# Altium PCB PCB1.PcbDoc
Units mm, origin at the board's own origin, x right, y up, seen from the top; angles counter-clockwise.
Board outline 60.25 x 80.25 mm, 2 copper layers (Top Layer, Bottom Layer); 11 components, 31 nets, 72 pads, 0 vias.
Unrouted connection lines stored in the file: 1.
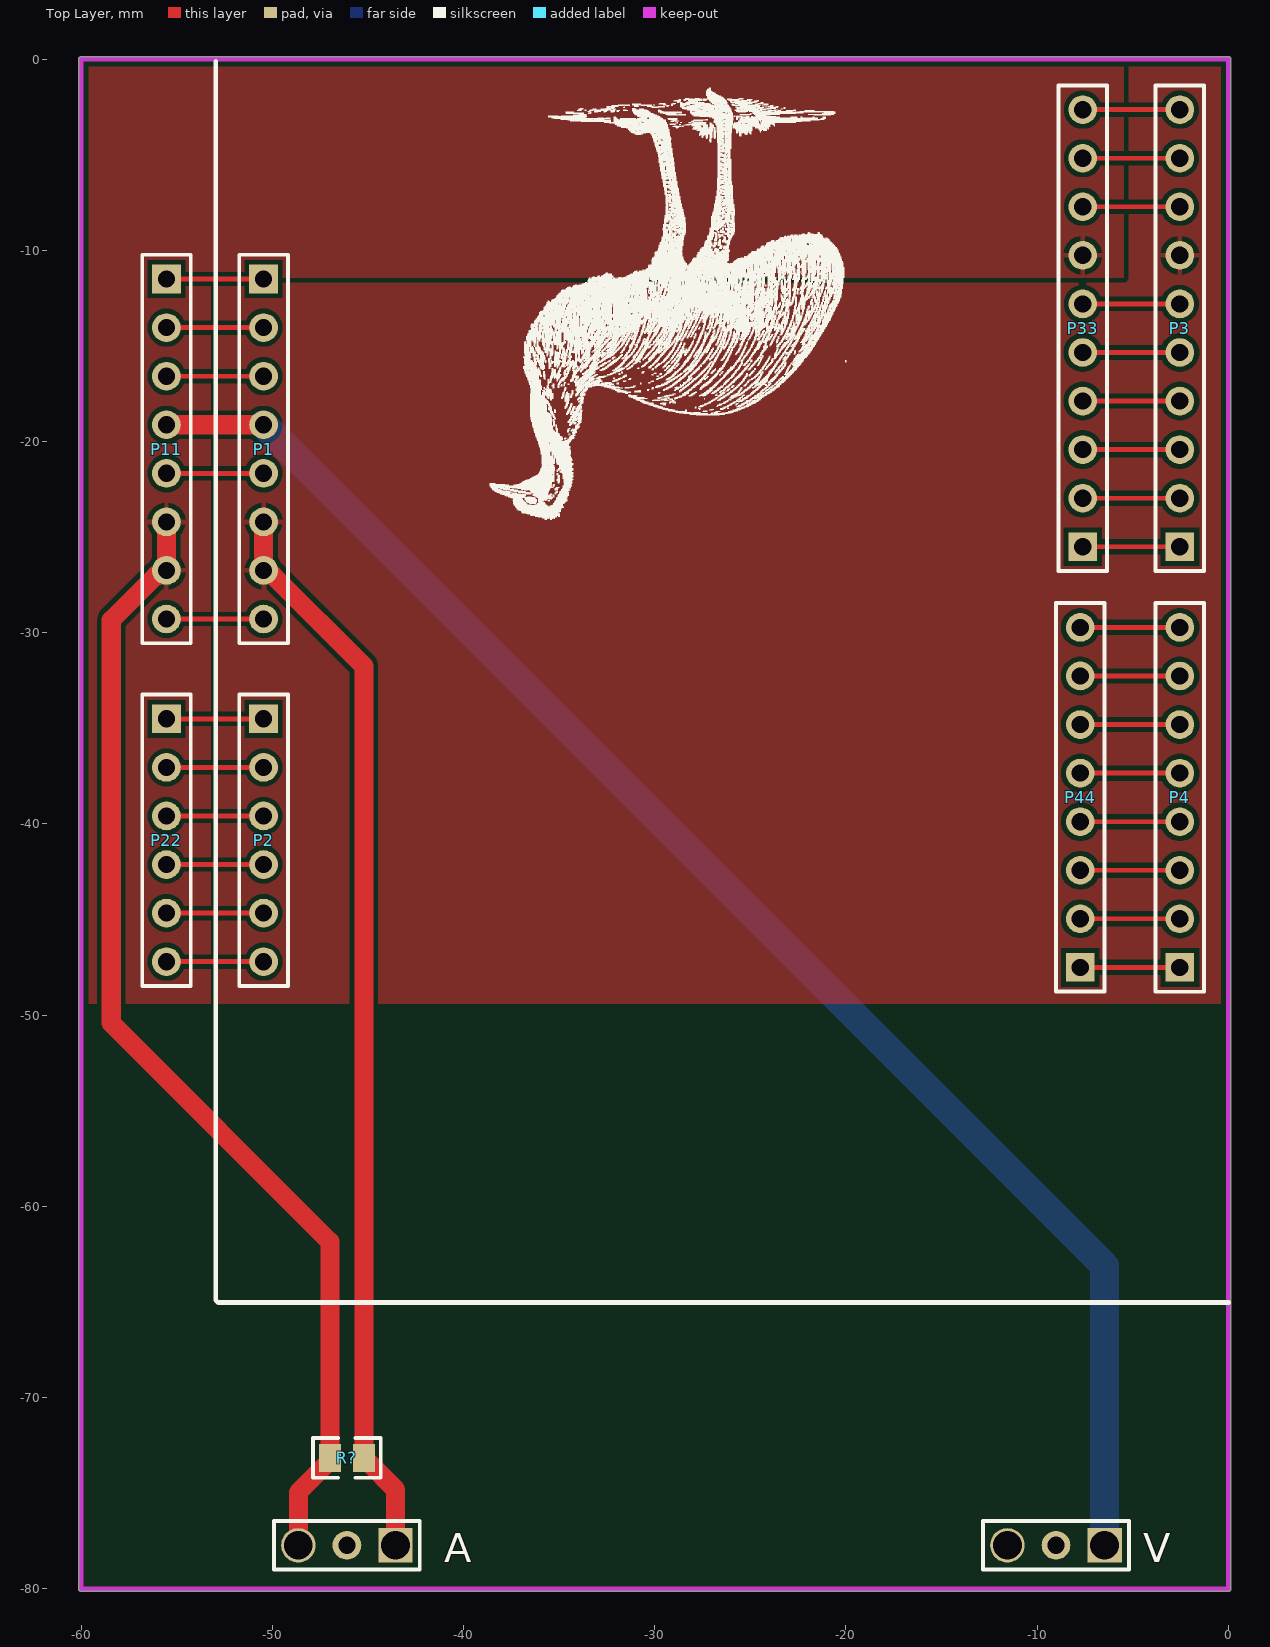
[diagram p0: Top Layer view]
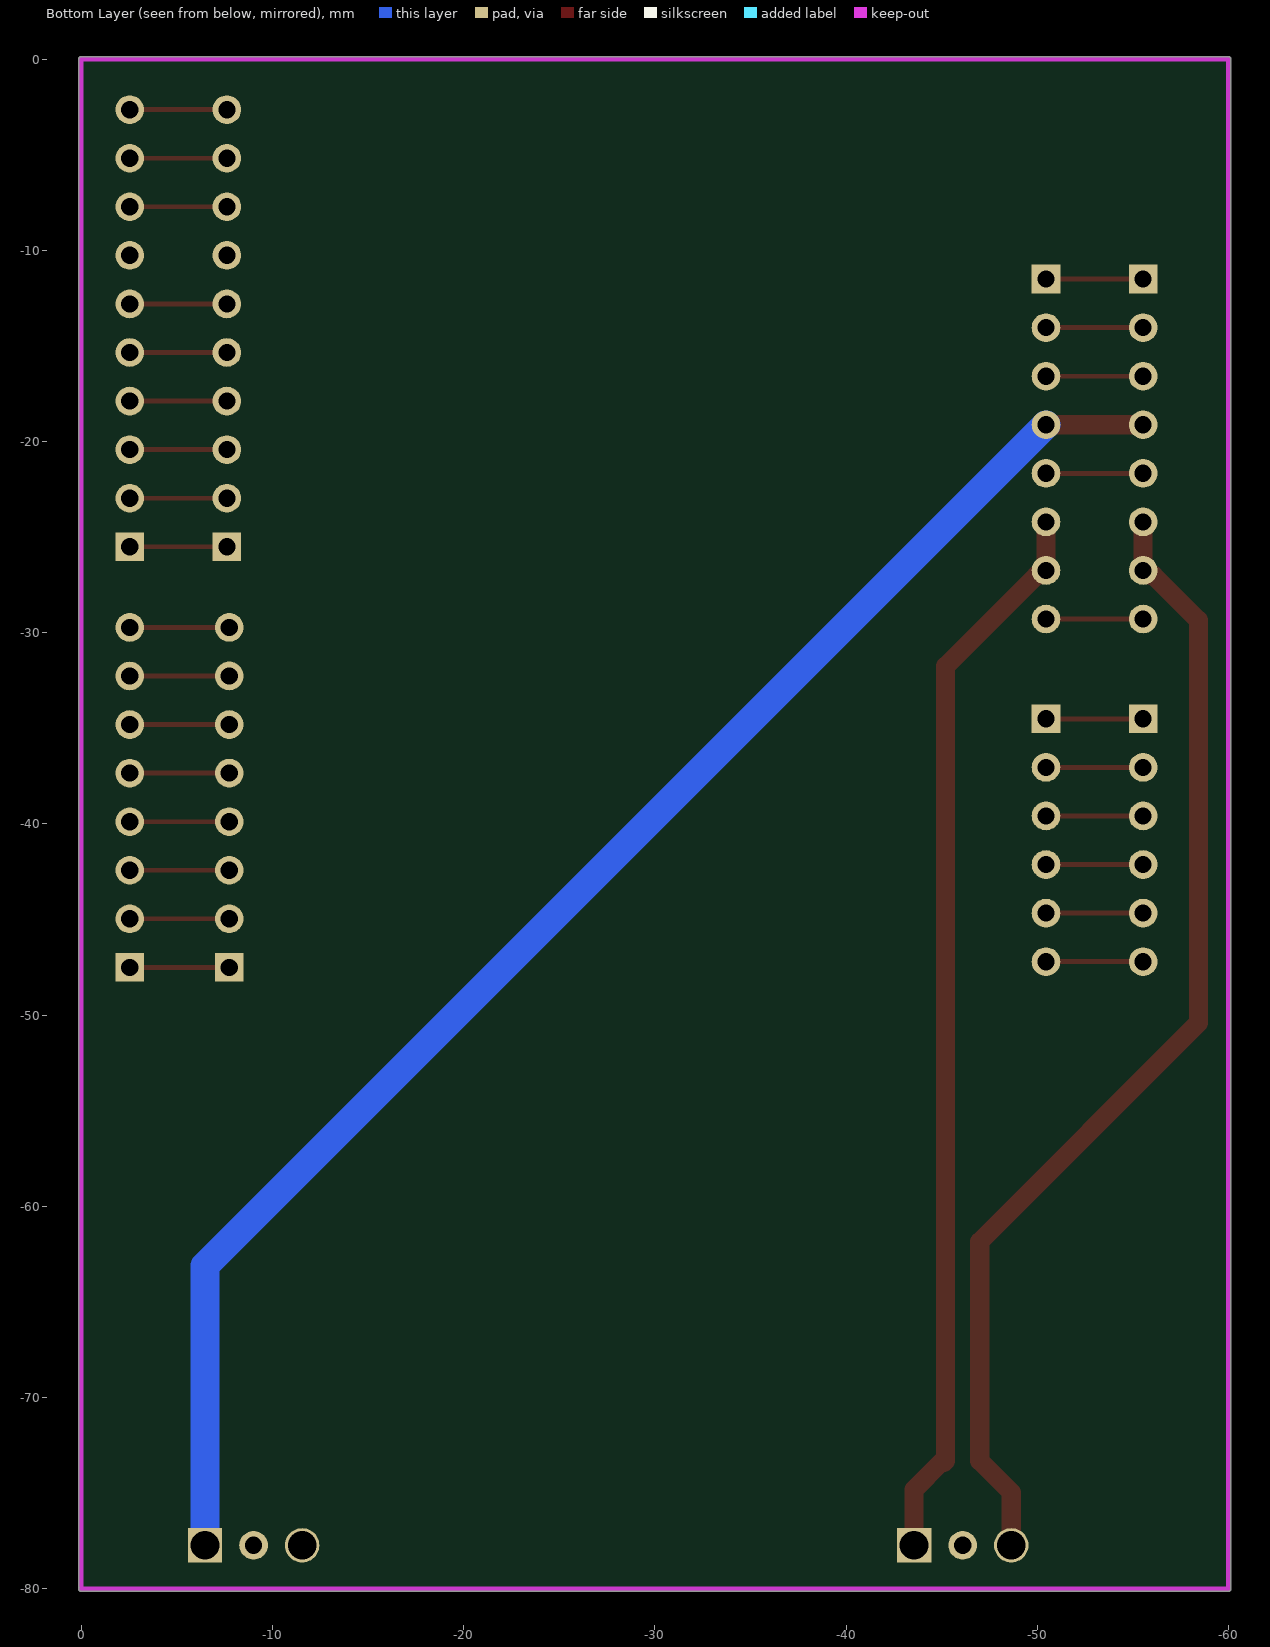
[diagram p1: Bottom Layer view, seen from below]

## Layer stack, top to bottom
Top Solder: solder mask 0.0102, Solder Resist, Dk 3.5
Top Layer: signal copper 0.0356
Dielectric 1: dielectric 0.32, FR-4, Dk 4.8
Bottom Layer: signal copper 0.0356
Bottom Solder: solder mask 0.0102, Solder Resist, Dk 3.5

## Board outline
-60.127,-80 -60.127,0 cw(c-60,0) -59.972,0.124 cw(c-59.944,0) -59.944,0.127 0,0.127 cw(c0,0) 0.127,0 0.127,-79.86 cw(c0,-79.86) 0.106,-79.93 cw(c0,-80) 0.127,-80 cw(c0,-80) 0,-80.127 -60,-80.127 cw(c-60,-80)

## Design rules (kind name [scope] priority, off if disabled: settings)
Clearance [All] p1: gap=0.254 ignorepadtopadclearanceinfootprint=FALSE except(0: Arc-Hole Track-Hole SMDPad-Hole THPad-Hole Via-Hole Fill-Hole Poly-Hole Region-Hole Text-Hole)
PolygonConnect [All] p1: connectstyle=Relief reliefconductorwidth=0.254 reliefentries=4 polygonreliefangle="90 Angle" airgapwidth=0.254
RoutingVias [All] p1: holewidth=0.711 width=1.27 viastyle="Through Hole" minholewidth=0.711 minwidth=1.27 maxholewidth=0.711 maxwidth=1.27
SolderMaskExpansion [All] p1: expansion=0.102 istentingtop=FALSE
Width [All] p1: maxlimit=99 minlimit=0.254 preferedwidth=0.254
30 further rules are at their usual default settings.

## Components (designator, comment, footprint, x,y, rotation, side; value= is the part's Value field where it differs from the comment)
A "Header 3" HDR1X3 -43.561,-77.724 r180 top (schematic designator current)
P1 "Header 8" HDR1X8 -50.46,-11.5 r270 top
P2 "Header 6" HDR1X6 -50.46,-34.5 r270 top
P3 "Header 10" HDR1X10 -2.54,-25.5 r90 top
P4 "Header 8" HDR1X8 -2.54,-47.5 r90 top
P11 "Header 8" HDR1X8 -55.54,-11.5 r270 top
P22 "Header 6" HDR1X6 -55.54,-34.5 r270 top
P33 "Header 10" HDR1X10 -7.62,-25.5 r90 top
P44 "Header 8" HDR1X8 -7.747,-47.498 r90 top
R? "0Ω (0R0) ±1%" 0805_R -46.102,-73.152 r0 top
V "Header 3" HDR1X3 -6.477,-77.724 r180 top (schematic designator voltage)

## Footprints (in the part's own frame and the unit in brackets; to place one, negate y for a bottom-side part, rotate by r counter-clockwise, add the part's x,y. Pads: shape width x height; smd on the part's side, far side on the other; paste and mask are expansions set on the pad)
0805_R [mm]
  rect 1.16x1.47 smd: 1(-0.89,0) 2(0.89,0)
  silkscreen extent -1.77,-1.04 1.77,1.03, body extent -1,-0.62 1,0.63, height 0.49
HDR1X3 [mm] "Connector; Header; 3 Position"
  rect 1.8x1.8 hole 1.5: 1(0,0)
  round 1.5 hole 0.9: 2(2.54,0)
  round 1.8 hole 1.5: 3(5.08,0)
  silkscreen extent -1.27,-1.27 6.35,1.27
HDR1X6 [mm] "Connector; Header; 6 Position"
  rect 1.5x1.5 hole 0.9: 1(0,0)
  round 1.5 hole 0.9: 2(2.54,0) 3(5.08,0) 4(7.62,0) 5(10.16,0) 6(12.7,0)
  silkscreen extent -1.27,-1.27 13.97,1.27
HDR1X8 [mm] "Connector; Header; 8 Position"
  rect 1.5x1.5 hole 0.9: 1(0,0)
  round 1.5 hole 0.9: 2(2.54,0) 3(5.08,0) 4(7.62,0) 5(10.16,0) 6(12.7,0) 7(15.24,0) 8(17.78,0)
  silkscreen extent -1.27,-1.27 19.05,1.27
HDR1X10 [mm] "Connector; Header; 10 Position"
  rect 1.5x1.5 hole 0.9: 1(0,0)
  round 1.5 hole 0.9: 2(2.54,0) 3(5.08,0) 4(7.62,0) 5(10.16,0) 6(12.7,0) 7(15.24,0) 8(17.78,0) 9(20.32,0) 10(22.86,0)
  silkscreen extent -1.27,-1.27 24.13,1.27

## Part data
A V: "Header, 3-Pin", LatestRevisionDate=17-Jul-2002, LatestRevisionNote="Re-released for DXP Platform.", Publisher="Altium Limited"
P1 P4 P11 P44: "Header, 8-Pin", LatestRevisionDate=17-Jul-2002, LatestRevisionNote="Re-released for DXP Platform.", Publisher="Altium Limited"
P2 P22: "Header, 6-Pin", LatestRevisionDate=17-Jul-2002, LatestRevisionNote="Re-released for DXP Platform.", Publisher="Altium Limited"
P3 P33: "Header, 10-Pin", LatestRevisionDate=17-Jul-2002, LatestRevisionNote="Re-released for DXP Platform.", Publisher="Altium Limited"
R?: library part "0805 0Ω (0R0) 1%", "贴片电阻", Package=0805, SuppliersPartNumber=C17477, ComponentLink1Description=供应商链接, ComponentLink1URL=http://www.szlcsc.com/product/details_18165.html, Supplier=LC

## Nets (pads, with @x,y where several pads share a name; then routed paths per layer and width w, separated by ;. In a path a pad name is that pad's centre, name@x,y a point inside that pad or via, vN(x,y) a via of type N, cw(c..) or ccw(c..) an arc to the next point about the centre after c; other vN are vias at no path point)
Board_VCC: P1.4 P11.4 V.1 | length 81.9
  Top Layer w1: P11.4 P1.4
  Bottom Layer w1.5: P1.4 -6.477,-63.103 V.1
Borad_GND: A.1 P1.6 P1.7 P3.7 R?.2 V.3 | length 56.6
  Top Layer w1: P1.6 P1.7 -50.325,-26.74 -50.075,-26.99 -49.972,-26.99 -45.212,-31.75 -45.212,-73.307 -45.132,-73.387 -44.977,-73.387 -43.561,-74.803 A.1
Connector_GND: A.3 P11.6 P11.7 P33.7 R?.1 | length 60.3
  Top Layer w0.254: R?.1@-46.992,-73.307 R?.1
  Top Layer w1: P11.6 P11.7 -55.675,-26.74 -55.925,-26.99 -56.073,-26.99 -58.428,-29.345 -58.428,-50.411 -46.992,-61.847 R?.1 ; A.3 -48.641,-74.956 R?.1@-46.992,-73.307
NetP1_1: P1.1 P11.1 | length 5.1
  Top Layer w0.254: P11.1 P1.1
NetP1_2: P1.2 P11.2 | length 5.1
  Top Layer w0.254: P11.2 P1.2
NetP1_3: P1.3 P11.3 | length 5.1
  Top Layer w0.254: P11.3 P1.3
NetP1_5: P1.5 P11.5 | length 5.1
  Top Layer w0.254: P11.5 P1.5
NetP1_8: P1.8 P11.8 | length 5.1
  Top Layer w0.254: P11.8 P1.8
NetP2_1: P2.1 P22.1 | length 5.1
  Top Layer w0.254: P22.1 P2.1
NetP2_2: P2.2 P22.2 | length 5.1
  Top Layer w0.254: P22.2 P2.2
NetP2_3: P2.3 P22.3 | length 5.1
  Top Layer w0.254: P22.3 P2.3
NetP2_4: P2.4 P22.4 | length 5.1
  Top Layer w0.254: P22.4 P2.4
NetP2_5: P2.5 P22.5 | length 5.1
  Top Layer w0.254: P22.5 P2.5
NetP2_6: P2.6 P22.6 | length 5.1
  Top Layer w0.254: P22.6 P2.6
NetP3_1: P3.1 P33.1 | length 5.1
  Top Layer w0.254: P33.1 P3.1
NetP3_2: P3.2 P33.2 | length 5.1
  Top Layer w0.254: P33.2 P3.2
NetP3_3: P3.3 P33.3 | length 5.1
  Top Layer w0.254: P33.3 P3.3
NetP3_4: P3.4 P33.4 | length 5.1
  Top Layer w0.254: P33.4 P3.4
NetP3_5: P3.5 P33.5 | length 5.1
  Top Layer w0.254: P33.5 P3.5
NetP3_6: P3.6 P33.6 | length 5.1
  Top Layer w0.254: P33.6 P3.6
NetP3_8: P3.8 P33.8 | length 5.1
  Top Layer w0.254: P33.8 P3.8
NetP3_9: P3.9 P33.9 | length 5.1
  Top Layer w0.254: P33.9 P3.9
NetP3_10: P3.10 P33.10 | length 5.1
  Top Layer w0.254: P33.10 P3.10
NetP4_1: P4.1 P44.1 | length 5.2
  Top Layer w0.254: P44.1 -2.542,-47.498 P4.1
NetP4_2: P4.2 P44.2 | length 5.2
  Top Layer w0.254: P44.2 -7.746,-44.959 P4.2 P4.2
NetP4_3: P4.3 P44.3 | length 5.2
  Top Layer w0.254: P44.3 -7.746,-42.419 P4.3 P4.3
NetP4_4: P4.4 P44.4 | length 5.2
  Top Layer w0.254: P44.4 -7.746,-39.879 P4.4 P4.4
NetP4_5: P4.5 P44.5 | length 5.2
  Top Layer w0.254: P44.5 -7.746,-37.339 P4.5 P4.5
NetP4_6: P4.6 P44.6 | length 5.2
  Top Layer w0.254: P44.6 -7.746,-34.799 P4.6 P4.6
NetP4_7: P4.7 P44.7 | length 5.2
  Top Layer w0.254: P44.7 -7.746,-32.259 P4.7 P4.7
NetP4_8: P4.8 P44.8 | length 5.2
  Top Layer w0.254: P44.8 -7.746,-29.719 P4.8 P4.8
pads on no net: A.2 V.2

## Polygon pours and split planes (outlines as drawn)
Connector_GND on Top Layer "CONNECTOR_GND_L01_P002" (solid, pour order 2): -5.207,-11.43 -5.207,0 -59.944,0 -59.944,-49.403 -53.086,-49.403 -53.086,-11.43
Borad_GND on Top Layer "BORAD_GND_L01_P000" (solid, pour order 0): -5.207,0 0,0 0,-49.403 -53.086,-49.403 -53.086,-11.43 -5.207,-11.43

## Keep-outs
Keep-Out Layer:
  lines w0.254: -60,0 -60,-79.999 0,-80 ; -59.944,0 0,0 0,-79.86

## Silkscreen, mask and mechanical layers (free items; w line width, h text height)
Top Overlay:
  drawing of 8968 lines, arcs and shapes, not listed